# Altium PCB PCB1.PcbDoc
Units mil, origin at the board's own origin, x right, y up, seen from the top; angles counter-clockwise.
Board outline 3500 x 2050 mil, 2 copper layers (Top Layer, Bottom Layer), stack 61.756 mil thick; 51 components, 44 nets, 209 pads, 196 vias.
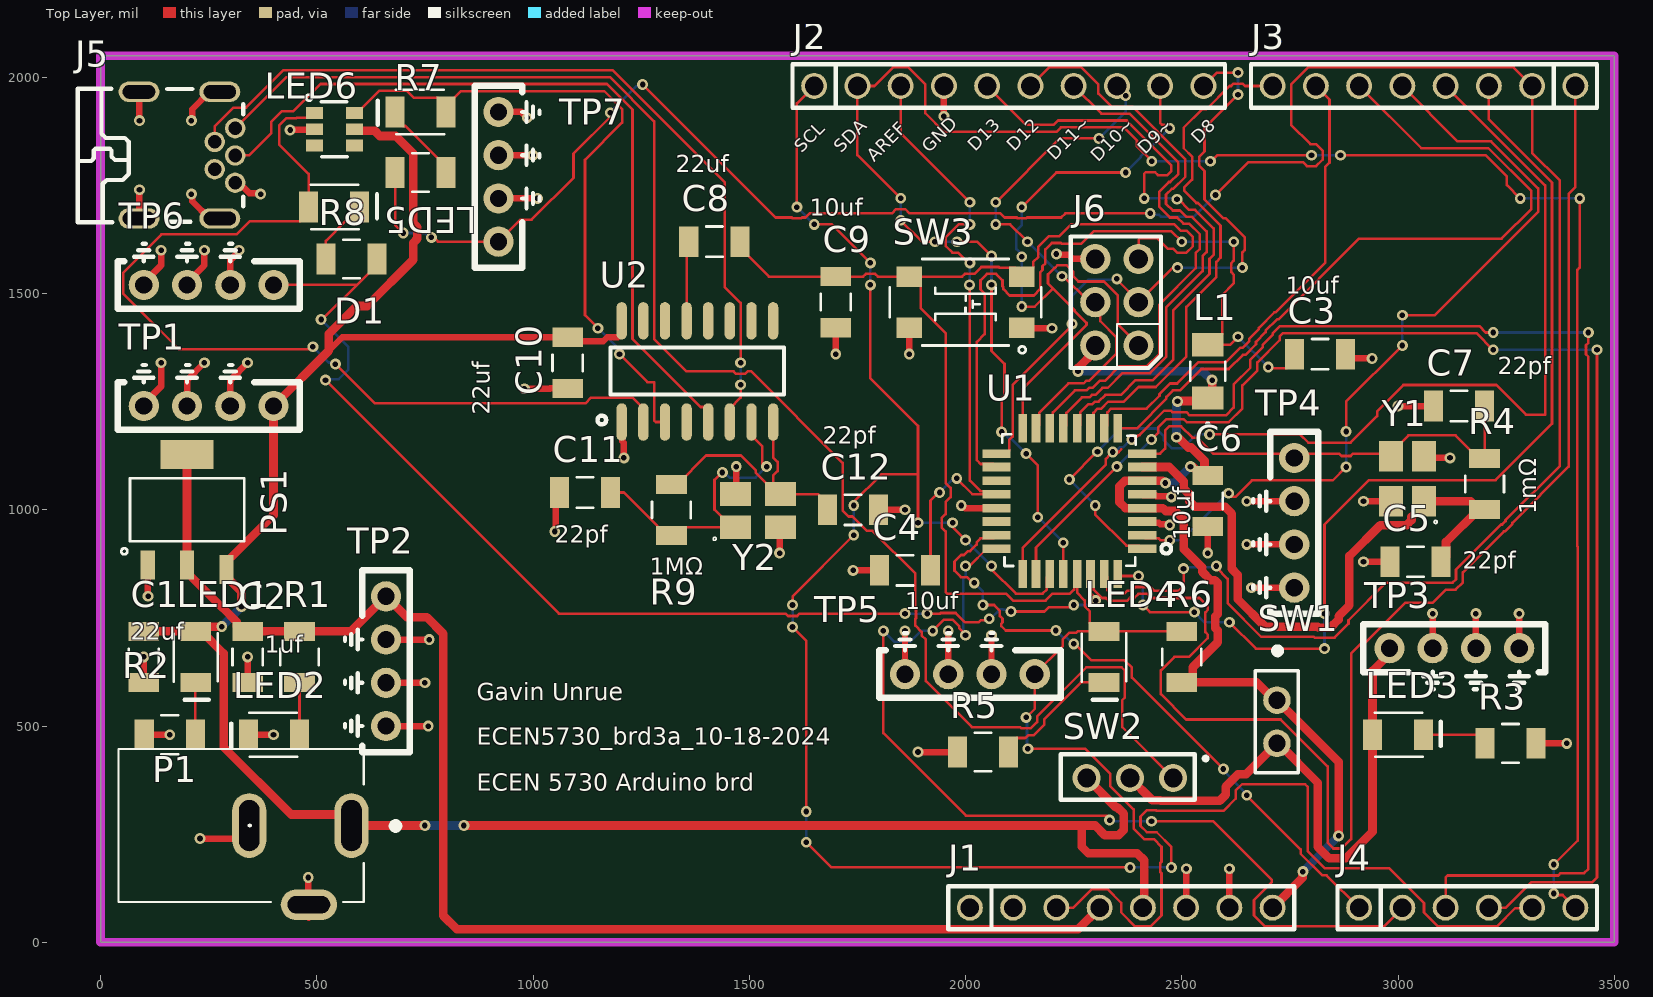
[diagram p0: Top Layer view]
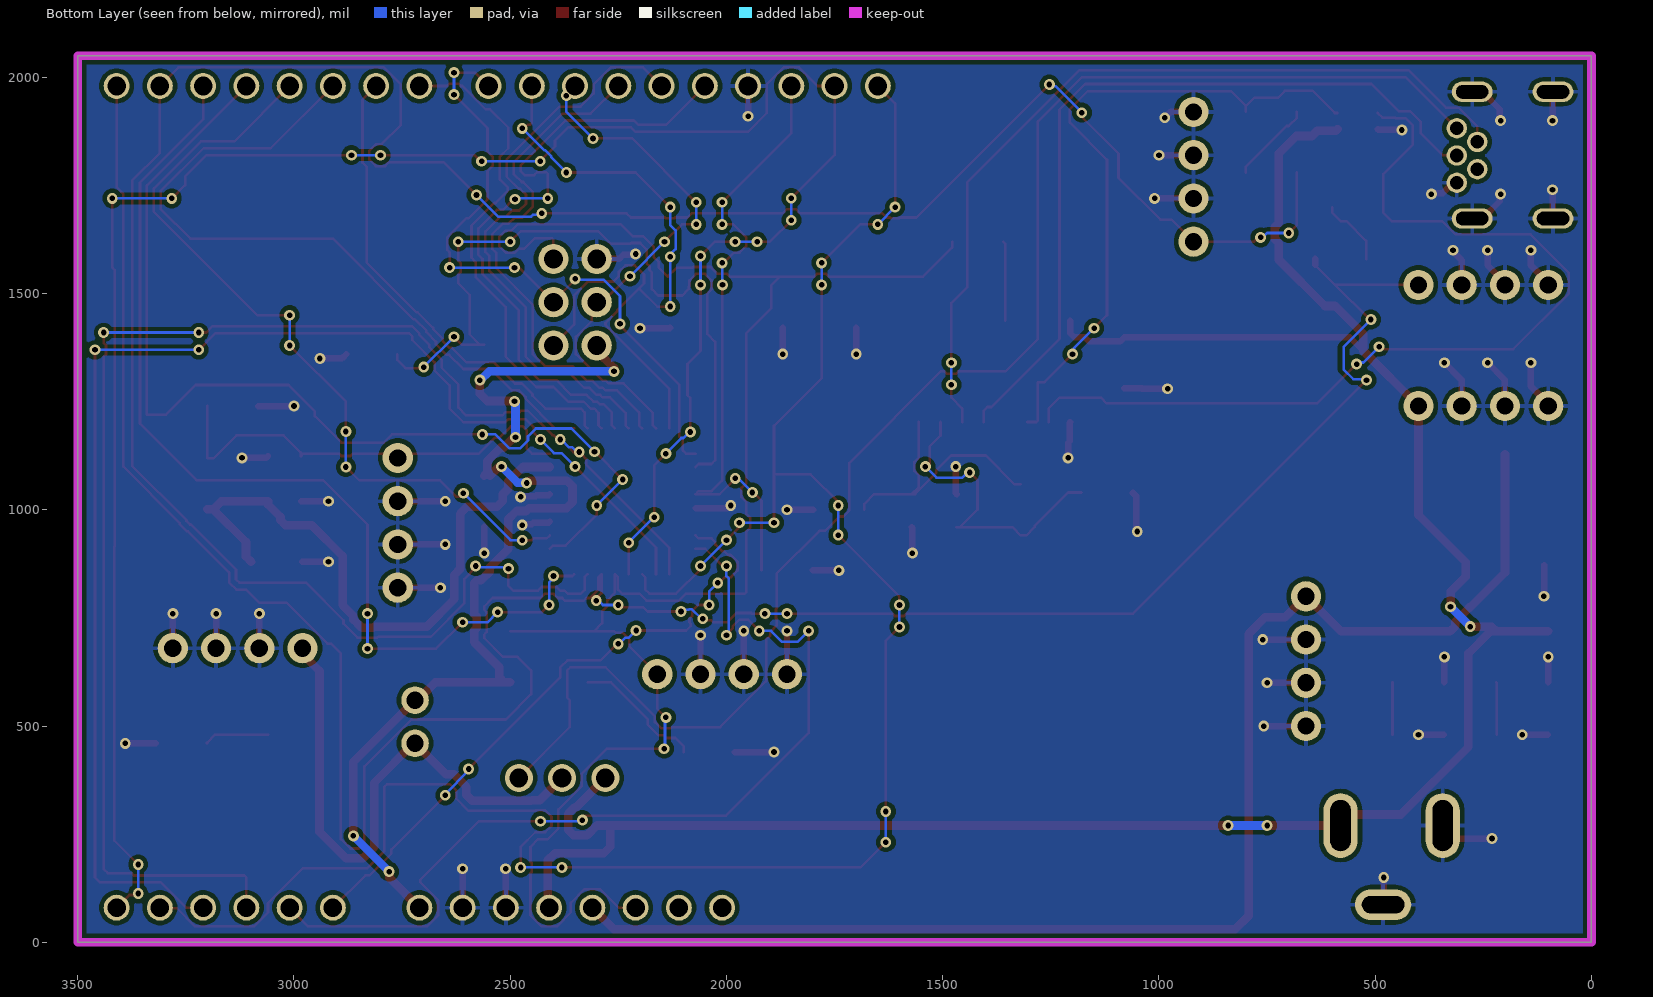
[diagram p1: Bottom Layer view, seen from below]
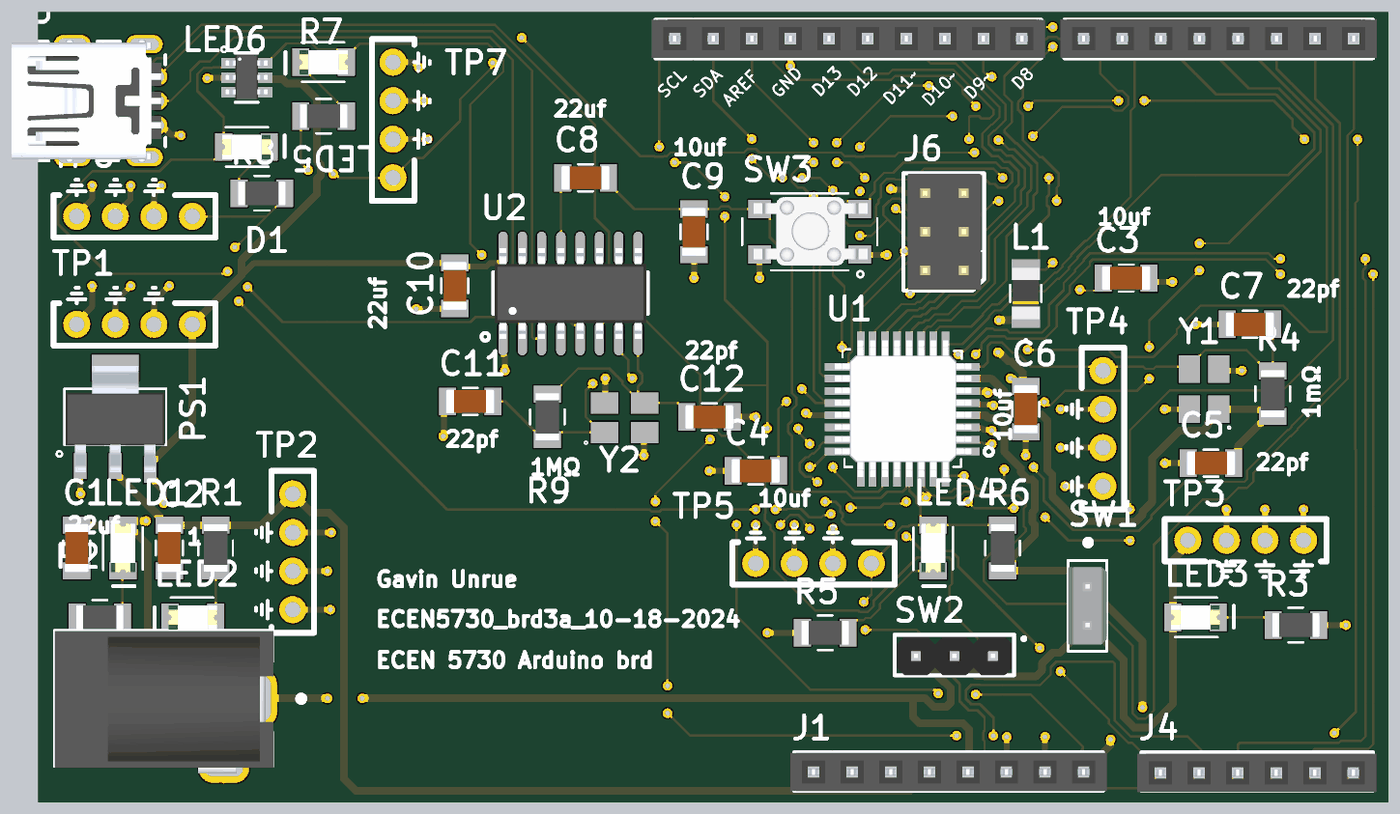
[diagram p2: 3D render of the assembled board from above, using the file's embedded part models]

## Layer stack, top to bottom
Top Solder: solder mask 1, SM-001, Dk 4
Top Layer: signal copper 1.378
Dielectric 1: core 59, Core-043, Dk 4.3
Bottom Layer: signal copper 1.378
Bottom Solder: solder mask 1, SM-001, Dk 4

## Board outline
0,0 3500,0 3500,2050 0,2050 0,1250

## Design rules (kind name [scope] priority, off if disabled: settings)
BoardOutlineClearance [All] p1: gap=10 ignorepadtopadclearanceinfootprint=FALSE except(0: Arc-SplitContinuation Track-SplitContinuation SMDPad-SplitContinuation THPad-SplitContinuation Via-SplitContinuation Fill-SplitContinuation Poly-SplitContinuation Region-SplitContinuation Text-SplitContinuation)
Clearance [All] p1: gap=10 ignorepadtopadclearanceinfootprint=FALSE
PlaneClearance [All] p1: clearance=10
PlaneConnect [All] p1: planeconnectstyle=Direct reliefexpansion=20 reliefentries=4 reliefconductorwidth=10 reliefairgap=10
PolygonConnect [All] p1: thpad.connectstyle=Relief thpad.reliefconductorwidth=10 thpad.reliefentries=4 thpad.polygonreliefangle="90 Angle" thpad.airgapwidth=10 smdpad.connectstyle=Direct smdpad.reliefconductorwidth=10 smdpad.reliefentries=4 smdpad.polygonreliefangle="90 Angle" smdpad.airgapwidth=10 via.connectstyle=Direct via.reliefconductorwidth=10 via.reliefentries=4 via.polygonreliefangle="90 Angle" via.airgapwidth=10
RoutingVias [All] p1: holewidth=13 width=25 viastyle="Through Hole" minholewidth=13 minwidth=25 maxholewidth=60 maxwidth=80
SolderMaskExpansion [All] p1: expansion=4 istentingtop=FALSE
UnRoutedNet [All] p1: checkbadconnections=TRUE
Width "Schematic Width Constraint" [InNet('+5')] p1: maxlimit=100 minlimit=10 preferedwidth=20 minimp=50.000000 maximp=50.000000 favimp=50.000000
Width [All] p2: maxlimit=100 minlimit=6 preferedwidth=6 minimp=50.000000 maximp=50.000000 favimp=50.000000
27 further rules are at their usual default settings.

## Components (designator, comment, footprint, x,y, rotation, side; value= is the part's Value field where it differs from the comment)
C1 "22uF" 1206_Passive_Capacitor 100,660 r90 top
C2 "1uF" 1206_Passive_Capacitor 340,660 r90 top
C3 "10uF" 1206_Passive_Capacitor 2820,1360 r180 top
C4 "10uF" 1206_Passive_Capacitor 1860,860 r0 top
C5 "22pF" 1206_Passive_Capacitor 3040,880 r0 top
C6 "10uF" 1206_Passive_Capacitor 2560,1020 r90 top
C7 "22pF" 1206_Passive_Capacitor 3141,1240 r0 top
C8 "22uF" 1206_Passive_Capacitor 1419,1620 r0 top
C9 "10uF" 1206_Passive_Capacitor 1700,1480 r90 top
C10 "22uF" 1206_Passive_Capacitor 1080,1340 r270 top
C11 "22pF" 1206_Passive_Capacitor 1120,1040 r0 top
C12 "22pF" 1206_Passive_Capacitor 1740,1000 r180 top
D1 "SRV05-4-P-T7" TVS 540,1880 r0 top value="TVS DIODE 5.5V 6TSOP"
J1 "PPTC081LFBN-RC" "8_PIN_100MIL - Female" 2010,80 r0 top value=Female
J2 "PPTC101LFBN-RC" 10_PIN_ARDUINO_100MIL 1650,1980 r0 top value=Female
J3 "PPTC081LFBN-RC" "8_PIN_100MIL - Female" 3410,1980 r180 top value=Female
J4 "PPTC061LFBN-RC" "6_PIN_100MIL -Female" 2910,80 r0 top value=Female
J5 "USB Mini" USB_MINI_B 200,1820 r270 top value="USB mini B"
J6 "NRPN032PAEN-RC" ICSP 2400,1380 r180 top
L1 "FB_10uH_1206" AIML-1206_ABR-M 2560,1320 r90 top
LED1 "Red" LED_1206 220,660 r270 top
LED2 "Red" LED_1206 401,480 r180 top
LED3 "Red" LED_1206 3000,480 r0 top
LED4 "Red" LED_1206 2320,660 r270 top
LED5 "Red" LED_1206 740,1920 r180 top
LED6 "Red" LED_1206 540,1700 r0 top
P1 "Power Jack" Power_Jack 580,270 r180 top value="CONN PWR JACK 2X5.5MM SOLDER"
PS1 "AMS1117-3.3" LDO 200,1000 r0 top value="IC REG LINEAR 3.3V 800MA SOT223"
R1 "1k" 1206_Passive_Resitor 460,660 r90 top value="1K Ohm"
R2 "1k" 1206_Passive_Resitor 160,480 r0 top value="1K Ohm"
R3 "1k" 1206_Passive_Resitor 3260,460 r180 top value="1K Ohm"
R4 "1M" 1206_Passive_Resitor 3200,1060 r270 top value="1M Ohm"
R5 "1k" 1206_Passive_Resitor 2040,440 r0 top value="1K Ohm"
R6 "10k" 1206_Passive_Resitor 2500,660 r90 top value=10KOhm
R7 "1k" 1206_Passive_Resitor 740,1780 r0 top value="1K Ohm"
R8 "1k" 1206_Passive_Resitor 580,1580 r180 top value="1K Ohm"
R9 "1M" 1206_Passive_Resitor 1320,1000 r270 top value="1M Ohm"
SW1 "led_on_off_sw" 2Pin-Header-Conn 2720,560 r270 top
SW2 "PREC003SAAN-RC" 3_PIN_100mil 2480,380 r180 top value="CONN HEADER VERT 3POS 2.54MM"
SW3 "TL3305AF160QG" Switch_JLC 2000,1480 r180 top
TP1 "5v TP" TP10x_Probe 250,1240 r180 top
TP2 "3.3v tp" TP10x_Probe 660,650 r270 top
TP3 "rg5vtp" TP10x_Probe 3130,680 r0 top
TP4 "atmegaXTALtp" TP10x_Probe 2760,970 r270 top
TP5 "resettp" TP10x_Probe 2010,620 r180 top
TP6 "rxtp" TP10x_Probe 250,1520 r180 top
TP7 "txtp" TP10x_Probe 920,1770 r90 top
U1 "ATMEGA328P-ANR" ATMega328P 2240,1020 r0 top value="IC MCU 8BIT 32KB FLASH 32TQFP"
U2 "CH340G" "USB to serial" 1380,1320 r0 top value="USB to Serial"
Y1 "X322516MLB4SI" "Crystal resonator" 3019.84,1071.97 r90 top value=16MHz
Y2 "X322512MSB4SI" "Crystal resonator" 1520,1000 r0 top value=12MHz

## Footprints (in the part's own frame and the unit in brackets; to place one, negate y for a bottom-side part, rotate by r counter-clockwise, add the part's x,y. Pads: shape width x height; smd on the part's side, far side on the other; paste and mask are expansions set on the pad)
2Pin-Header-Conn [mm]
  round 1.62 hole 1.02: 1(0,0) 2(2.54,0)
  silkscreen extent -3.03,-1.27 4.26,1.26, body extent -1.27,-1.27 3.81,1.27, height 8.13
3_PIN_100mil [mm]
  round 1.65 hole 1.1: 1(0,0) 2(2.54,0) 3(5.08,0)
  silkscreen extent -2,-1.4 6.6,1.27, body extent -1.14,-1.27 6.48,1.27, height 8.38
"6_PIN_100MIL -Female" [mil]
  round 60 hole 43.31: 1(0,0) 2(100,0) 3(200,0) 4(300,0) 5(400,0) 6(500,0)
  silkscreen extent -50,-50 550,50, body extent -61,-53 559,47, height 335
"8_PIN_100MIL - Female" [mil]
  round 60 hole 43.31: 1(0,0) 2(100,0) 3(200,0) 4(300,0) 5(400,0) 6(500,0) 7(600,0) 8(700,0)
  silkscreen extent -50,-50 750,50, body extent -60,-51 760,49, height 335
10_PIN_ARDUINO_100MIL [mil]
  round 60 hole 43.31: 1(0,0) 2(100,0) 3(200,0) 4(300,0) 5(400,0) 6(500,0) 7(600,0) 8(700,0) 9(800,0) 10(900,0)
  silkscreen extent -50,-50 950,50, body extent -60,-49 960,51, height 335
1206_Passive_Capacitor [mil]
  rect 44x71 smd: 1(-59,0) 2(59,0)
  silkscreen extent -19,-35 19,35, body extent -63,-31 63,32, height 50
1206_Passive_Resitor [mil]
  rect 44x71 smd: 1(-59,0) 2(59,0)
  silkscreen extent -19,-45 19,45, body extent -61,-31 61,31, height 26
AIML-1206_ABR-M [mil]
  rect 54x73 smd paste+0 mask+0: 1(-61.5,0) 2(61.5,0)
  silkscreen extent -124,-40 22,40, body extent -66,-36 66,36, height 55
ATMega328P [mm]
  rect 1.65x0.508 smd mask+0.025: 1(4.28,-2.794) 2(4.28,-2.007) 3(4.28,-1.194) 4(4.28,-0.406) 5(4.28,0.406) 6(4.28,1.194) 7(4.28,2.007) 8(4.28,2.794) 17(-4.28,2.794) 18(-4.28,2.007) 19(-4.28,1.194) 20(-4.28,0.406) 21(-4.28,-0.406) 22(-4.28,-1.194) 23(-4.28,-2.007) 24(-4.28,-2.794)
  rect 0.508x1.65 smd mask+0.025: 9(2.843,4.28) 10(2.056,4.28) 11(1.243,4.28) 12(0.455,4.28) 13(-0.357,4.28) 14(-1.145,4.28) 15(-1.958,4.28) 16(-2.745,4.28) 25(-2.745,-4.28) 26(-1.958,-4.28) 27(-1.145,-4.28) 28(-0.357,-4.28) 29(0.455,-4.28) 30(1.243,-4.28) 31(2.056,-4.28) 32(2.843,-4.28)
  silkscreen extent -3.94,-3.81 5.97,3.94, body extent -4.45,-4.47 4.55,4.53, height 1.16
"Crystal resonator" [mm]
  rect 1.8x1.4 smd: 1(-1.32,-1.02) 2(1.32,-1.02) 3(1.32,0.92) 4(-1.32,0.92)
  silkscreen extent -2.63,-1.79 -2.45,-1.61, body extent -1.65,-1.2 1.65,1.2, height 0.8
ICSP [mil]
  round 70 hole 43.31: 1(0,0) 2(0,-100) 3(0,-200) 4(100,0) 5(100,-100) 6(100,-200)
  silkscreen extent -52,-252 157,52, body extent -44,-250 146,50, height 330
LDO [mm]
  rect 0.838x1.7 smd: 1(-2.311,-3.25) 2(0,-3.25) 3(2.311,-3.5)
  rect 3.099x1.7 smd: 4(0,3.25)
  silkscreen extent -3.86,-2.62 3.35,1.85, body extent -3.25,-3.65 3.25,3.35, height 1.85
LED_1206 [mil]
  rect 44x71 smd: 1(-59,0) 2(59,0)
  silkscreen extent -54,-51 99,51, body extent -63,-31 63,31, height 28
Power_Jack [mm]
  oval 2x3.8 hole 1.2 slot 3 at 90 deg: 1(0,0) 2(6,0)
  oval 3.3x1.8 hole 1 slot 2.5 at 0 deg: 3(2.5,4.65)
  silkscreen extent -2.79,-4.5 13.68,4.5, body extent -0.76,-4.45 13.64,4.95, height 11.49
Switch_JLC [mm]
  rect 1.5x1.2 smd: 1(-3.3,1.5) 2(3.3,1.5) 3(-3.3,-1.5) 4(3.3,-1.5)
  silkscreen extent -4.44,-2.54 4.45,3, body extent -3.8,-2.29 3.7,2.21, height 3.7
TP10x_Probe [mil] "Small Probs footprint"
  round 70 hole 40: 1(-150,0) 2(-50,0) 2(50,0) 2(150,0)
  silkscreen extent -210,-95 210,55
TVS [mm]
  rect 1x0.7 smd mask+0.025: 1(-1.162,0.95) 2(-1.162,0) 3(-1.162,-0.95) 4(1.2,-0.95) 5(1.2,0) 6(1.2,0.95)
  silkscreen extent -1.65,-1.63 0.76,2.03, body extent -1.37,-1.44 1.38,1.46, height 1.1
"USB to serial" [mil]
  oval 24x86.61 smd: 1(-175,-117) 2(-125,-117) 3(-75,-117) 4(-25,-117) 5(25,-117) 6(75,-117) 7(125,-117) 8(175,-117) 9(175,117) 10(125,117) 11(75,117) 12(25,117) 13(-25,117) 14(-75,117) 15(-125,117) 16(-175,117)
  silkscreen extent -231,-122 201,56, body extent -197,-118 197,118, height 71
USB_MINI_B [mm]
  round 1.2 hole 0.8: 1(-1.58,2.826) 2(-0.78,1.622) 3(0.02,2.826) 4(0.82,1.622) 5(1.62,2.826)
  oval 1.2x2.4 hole 0.8 slot 1.9 at 90 deg: 6(-3.72,1.924) 7(3.72,1.924) 8(-3.72,-2.826) 9(3.72,-2.826)
  silkscreen extent -3.89,-6.42 3.93,3.3, body extent -4.04,-6.83 4.06,3.02, height 3.98

## Part data
C1 C8 C10: library part C_22uF_1206, "22uF ±10% 25V X5R 1206 Multilayer Ceramic Capacitors MLCC - SMD/SMT RoHS", LCSC Part#=C12891, MFR Part #=CL31A226KAHNNNE, Datasheet=https://datasheet.lcsc.com/lcsc/1811031514_Samsung-Electro-Mechanics-CL31A226KAHNNNE_C12891.pdf, Type=basic
C2: library part C_1uF_1206, "MULTILAYER CERAMIC CAPACITORS MLCC - SMD/SMT 1UF 50V 1206 ROHS", LCSC Part#=C1848, MFR Part #=CL31B105KBHNNNE, Digikey Link=https://www.digikey.com/product-detail/en/C1206C105M4RACTU/399-8150-1-ND/3471873/?itemSeq=304982366, Type=Basic
C3 C4 C6 C9: library part C_10uF_1206, "10uF ±10% 50V X5R 1206 Multilayer Ceramic Capacitors MLCC - SMD/SMT RoHS", LCSC Part#=C13585, MFR Part #=CL31A106KBHNNNE, Datasheet=https://datasheet.lcsc.com/lcsc/1810221112_Samsung-Electro-Mechanics-CL31A106KBHNNNE_C13585.pdf, Type=Basic
C5 C7 C11 C12: library part C_22pF_1206, "22pF ±5% 1kV C0G 1206 Multilayer Ceramic Capacitors MLCC - SMD/SMT RoHS", LCSC Part#=C107174, MFR Part #=CC1206JKNPOCBN220, Datasheet=https://datasheet.lcsc.com/lcsc/1810241219_YAGEO-CC1206JKNPOCBN220_C107174.pdf, Type=Extended
D1: library part D_TVS_Diode, "TVS SOT-23-6 ROHS", LCSC Part#=C85364, Datasheet=https://datasheet.lcsc.com/szlcsc/ProTek-Devices-SRV05-4-P-T7_C85364.pdf, MFR Part #=SRV05-4-P-T7, Type=Basic
J1 J3: library part JF_8_PIN_FEMALE, "8 Position Header Connector 0.100\" (2.54mm) Through Hole Tin", LCSC Part#=C27438, Digikey Link=https://www.digikey.com/product-detail/en/PPTC081LFBN-RC/S7006-ND/810147/?itemSeq=304982354, MFR Part #=PPTC081LFBN-RC, Type=Extended
J2: library part JF_10_PIN_FEMA_ARDUINO, "10 Position Header Connector 0.100\" (2.54mm) Through Hole Tin", LCSC Part#=C225507, Digikey Link=https://www.digikey.com/product-detail/en/PPTC101LFBN-RC/S7008-ND/810149/?itemSeq=304982352, MFR Part #=PPTC101LFBN-RC, Type=Extended
J4: library part JF_6_PIN_FEMALE, "6 Position Header Connector 0.100\" (2.54mm) Through Hole Tin", LCSC Part#=C40877, Digikey Link=https://www.digikey.com/product-detail/en/PPTC061LFBN-RC/S7004-ND/810145/?itemSeq=304982353, MFR Part #=PPTC061LFBN-RC, Type=Extended
J5: library part J_USB_B_Mini, "Through Hole USB Connectors RoHS", LCSC Part#=C46398, MFR Part #=920-462A2021D10102, Datasheet=https://datasheet.lcsc.com/szlcsc/2103081233_Jing-Extension-of-the-Electronic-Co-920-462A2021D10102_C46398.pdf, Type=Extended
J6: library part J_ICSP, "Connector Header Through Hole 6 position 0.079\" (2.00mm)", LCSC Part#=C124384, Digikey Link=https://www.digikey.com/product-detail/en/NRPN032PAEN-RC/S5801-03-ND/804955/?itemSeq=304982355, MFR Part #=NRPN032PAEN-RC, Type=Extended
L1: "25mA 10uH ±10% 800mΩ 1206  Inductors (SMD) ROHS", LCSC Part#=C1051, MFR Part #=CMI321609X100KT, Mfr_Name="FH (Guangdong Fenghua Advanced Tech)", Datasheet=https://datasheet.lcsc.com/lcsc/1810311314_FH--Guangdong-Fenghua-Advanced-Tech-CMI321609X100KT_C1051.pdf, Type=Basic
LED1 LED2 LED3 LED4 LED5 LED6: library part LED_RED_1206, "Red 621~631nm 1206 Light Emitting Diodes (LED) RoHS", LCSC Part#=C93133, MFR Part #=15-21/R6C-FQ1R1B/2T, Datasheet=https://datasheet.lcsc.com/szlcsc/1811151241_Everlight-Elec-15-21-R6C-FQ1R1B-2T_C93133.pdf, Type=Extended
P1: library part "P_Power Jack", "Power Barrel Connector Jack 2.10mm ID (0.083\"), 5.50mm OD (0.217\") Through Hole, Right Angle", LCSC Part#=C136744, MFR Part #=PJ-102A, Digikey Link=https://www.digikey.com/product-detail/en/PJ-102A/CP-102A-ND/275425/?itemSeq=304982367, Type=Extended
PS1: library part PS_AMS_LDO_3v3, "LOW DROPOUT REGULATORS(LDO) POSITIVE FIXED 1.3V @ 800MA 15V 3.3V 1A SOT-223 ROHS", LCSC Part#=C6186, MFR Part #=AMS1117-3.3, Type=Basic
R1 R2 R3 R5 R7 R8: library part R_1K_1206, "CHIP RESISTOR - SURFACE MOUNT 1KOHMS ±1% 1/4W 1206 ROHS", LCSC Part#=C4410, MFR Part #=RNCP1206FTD1K00CT, Digikey Link=https://www.digikey.com/product-detail/en/RNCP1206FTD1K00/RNCP1206FTD1K00CT-ND/2240675/?itemSeq=304982373, Type=Basic
R4 R9: library part R_1M_1206, "CHIP RESISTOR - SURFACE MOUNT 1MOHMS ±1% 1/4W 1206 ROHS", LCSC Part#=C17927, MFR Part #=RMCF1206JT1M00, Digikey Link=https://www.digikey.com/product-detail/en/RMCF1206JT1M00/RMCF1206JT1M00CT-ND/1942830/?itemSeq=304982358, Type=Basic
R6: library part R_10KOhm_1206, "10 kOhms ±5% 0.25W, 1/4W Chip Resistor 1206 (3216 Metric) Automotive AEC-Q200 Thick Film", LCSC Part#=C17902, MFR Part #=RMCF1206FT10K0, Digikey Link=https://www.digikey.com/en/products/detail/stackpole-electronics-inc/RMCF1206FT10K0/1759669, Type=Basic
SW1: library part SW_2Pin_100mil_Switch, "2Pin Header", LCSC Part#=C124375, Type=Extended
SW2: library part SW_3Pin_100mil_Switch, "Connector Header Through Hole 3 position 0.100\" (2.54mm)", LCSC Part#=C49257, Digikey Link=https://www.digikey.com/product-detail/en/PREC003SAAN-RC/S1012EC-03-ND/2774851/?itemSeq=304982371, MFR Part #=PREC003SAAN-RC, Type=Extended
SW3: library part SW_Push_Button_JLC, "Tactile Switch SPST-NO Top Actuated Surface Mount", LCSC Part#=C2837550, MFR Part #=KH-4.5X4.5X4.3H-STM, Datasheet=https://datasheet.lcsc.com/lcsc/2106081532_Shenzhen-Kinghelm-Elec-KH-4.5X4.5X4.3H-STM_C2837550.pdf, Type=Extended
TP1 TP2 TP3 TP4 TP5 TP6 TP7: library part TP_10x_Probe, "Test Point 300 mil centers"
U1: library part U_ATMega328P, "AVR AVR® ATmega Microcontroller IC 8-Bit 20MHz 32KB (16K x 16) FLASH 32-TQFP (7x7)", LCSC Part#=C14877, MFR Part #=ATMEGA328P-AU, Digikey Link=https://www.digikey.com/product-detail/en/ATMEGA328P-ANR/ATMEGA328P-ANRCT-ND/2774230/?itemSeq=304982365, Type=Basic
U2: library part U_USBtoSerial, "Transceiver USB 2.0 2Mbps SOP-16_150mil USB ICs RoHS", LCSC Part#=C14267, Datasheet=https://datasheet.lcsc.com/lcsc/2008191806_WCH-Jiangsu-Qin-Heng-CH340G_C14267.pdf, MFR Part #=CH340G, Type=Basic
Y1: library part X_16Mhz_Res, "±10ppm 16000000Hz -40℃~85℃ 贴片无源晶振 60Ω 9pF SMD3225-4P Crystals ROHS", LCSC Part#=C13738, MFR Part #=X322516MLB4SI, Type=Basic
Y2: library part X_12MHz_Res, "SMD Crystal Resonators 12MHz ±10ppm SMD-3225_4P RoHS", LCSC Part#=C9002, Datasheet=https://datasheet.lcsc.com/szlcsc/Yangxing-Tech-X322512MSB4SI_C9002.pdf, MFR Part #=X322512MSB4SI, Type=Basic

## Via types
v1: diameter 25, hole 13, Top Layer to Bottom Layer, 196 vias

## Nets (pads, with @x,y where several pads share a name; then routed paths per layer and width w, separated by ;. In a path a pad name is that pad's centre, name@x,y a point inside that pad or via, vN(x,y) a via of type N, cw(c..) or ccw(c..) an arc to the next point about the centre after c; other vN are vias at no path point)
3v: C2.2 J1.4 PS1.2 PS1.4 R1.2 TP2.1 | length 3200.4
  Top Layer w20: PS1.4 PS1.2 200,855.08 281.01,774.08 281.89,774.08 314.5,741.46 314.5,731 326.5,719 R1.2 579,719 TP2.1 708.05,751.95 754.01,751.95 792.5,713.46 792.5,61.72 824.22,30 2260,30 J1.4
+5: C1.2 C10.1 D1.5 J1.5 LED1.1 P1.1 PS1.3 SW2.3 TP1.1 U2.16 | length 5349.4
  Top Layer w15: 527.59,1367.59 559,1399 C10.1 1089,1390 1162.43,1390 1171.43,1399 1195.87,1399 1205,1408.13 U2.16
  Top Layer w20: C1.2 LED1.1 ; v1(280,730) 231,730 LED1.1 ; v1(325.96,775.96) 325.01,776.92 325.01,811.23 291,845.24 PS1.3 291,879.17 400,988.17 TP1.1 527.59,1367.59 527.59,1406.48 592.46,1471.35 616.13,1471.35 723,1578.22 723,1617.04 732.5,1626.54 732.5,1653.46 723,1662.96 723,1823.78 682.28,1864.5 645.55,1864.5 633.67,1876.38 590.87,1876.38 D1.5 ; v1(750,270) P1.1 554.57,295.43 440.78,295.43 284.5,451.72 284.5,668 233.5,719 LED1.1 ; v1(840,270) 2268.28,270 ; SW2.3 2347.5,312.5 2350.65,312.5 2365.5,297.65 2365.5,259.54 2353.46,247.5 2322.12,247.5 2299.62,270 2268.28,270 ; J1.5 2413,83 2413,189.53 2396.91,205.62 2284.38,205.62 2268.28,221.72 2268.28,270
  Bottom Layer w20: v1(280,730) v1(325.96,775.96) ; v1(750,270) v1(840,270)
dtr: C8.1 U2.13 | length 185.1
  Top Layer w6: U2.13 1355,1615 C8.1
GND: C1.1 C2.1 C3.1 C4.1 C5.1 C6.1 C7.1 C9.1 C10.2 C11.1 C12.1 D1.2 J1.6 J1.7 J2.4 J5.5 J5.6 J5.7 J5.8 J5.9 J6.6 LED2.2 P1.2 P1.3 PS1.1 R2.1 R3.1 R5.1 SW3.1 SW3.2 TP1.2 TP2.2 TP3.2 TP4.2 TP5.2 TP6.2 TP7.2 U1.3 U1.5 U1.21 U2.1 Y1.2 Y1.4 Y2.2 Y2.4 | length 4831.7
  Top Layer w15: J5.9 90,1674.8 v1(90,1740) ; J5.8 90,1965.2 v1(90,1900) ; C1.1 v1(100,660) ; TP1.2@100,1240 100,1245.14 140,1285.14 v1(140,1340) ; TP6.2@100,1520 100,1525.14 139.86,1565 139.86,1599.86 v1(140,1600) ; R2.1 v1(160,480) ; PS1.1 109.5,871.55 109.5,800.5 v1(110,800) ; TP1.2@200,1240 200.21,1240.21 200.21,1300.21 v1(240,1340) ; TP6.2@200,1520 200,1525.14 239.86,1565 239.86,1599.86 v1(240,1600) ; v1(210,1730) 211.91,1728.09 211.91,1713.76 252.13,1673.55 J5.7 ; v1(210,1900) 211.91,1901.91 211.91,1926.24 252.13,1966.45 J5.6 ; v1(230,240) P1.2@343.78,240 ; TP1.2@300,1240 300.21,1240.21 300.21,1300.21 v1(340,1340) ; TP6.2@300,1520 300.21,1520.21 300.21,1577.5 320,1597.29 v1(320,1600) ; J5.5 319.98,1756.22 344.29,1731.91 368.09,1731.91 v1(370,1730) ; C2.1 v1(340,660) ; LED2.2 v1(400,480) ; v1(438.22,1878.22) 439.11,1879.11 493.34,1879.11 D1.2 ; v1(480,150) 480,58.5 P1.3@481.57,56.93 ; TP2.2@660,500 v1(757.5,500) ; TP2.2@660,600 v1(750,600) ; TP2.2@660,700 v1(760,700) ; TP7.2@920,1720 v1(1010,1720) ; TP7.2@920,1820 v1(1000,1820) ; TP7.2@920,1920 973.21,1920 v1(986.62,1906.62) ; v1(980,1280) 1039,1280 1040,1281 C10.2 ; v1(1050,950) 1051.91,951.91 1051.91,1030.91 C11.1 ; U2.1 1206.72,1201.28 1206.72,1158.28 1210,1155 v1(1210,1120) ; Y2.4 1470,1038.19 v1(1470,1100) ; v1(1570,900) 1570,957.87 Y2.2 ; v1(1700,1360) C9.1 ; v1(1740,860) C4.1 ; C12.1 v1(1860,1000) ; TP5.2@1860,620 v1(1860,720) ; v1(1870,1360) 1870,1420.87 SW3.2 ; v1(1890,440) R5.1 ; v1(1950,1910) J2.4 ; TP5.2@1960,620 v1(1960,720) ; v1(1990,1010) 1992.71,1010 1998.71,1004 U1.21 ; TP5.2@2060,620 v1(2060,710) ; SW3.1 2130.87,1420 v1(2200,1420) ; v1(2210,1591.5) 2211.91,1589.59 2238.56,1589.59 2248.14,1580 J6.6 ; U1.3 2411,970.5 2444.5,970.5 2445,970 2446.73,970 2450.11,966.63 2470.09,966.63 v1(2472,964.71) ; U1.5 2411,1033.5 2439.72,1033.5 2441.38,1031.84 2474.08,1031.84 v1(2476,1029.93) ; J1.6 2510.34,80.34 2510.34,169.6 v1(2510.67,169.94) ; v1(2560,900) C6.1 ; J1.7 v1(2610,170) ; v1(2650,920) TP4.2@2760,920 ; v1(2650,1020) TP4.2@2760,1020 ; v1(2661.5,820) TP4.2@2760,820 ; C3.1 2889,1350 v1(2940,1350) ; v1(2920,880) C5.1 ; v1(2920,1020) Y1.4 ; v1(3000,1240) C7.1 ; Y1.2 3063.94,1120 v1(3120,1120) ; TP3.2@3080,680 v1(3080,760) ; TP3.2@3180,680 v1(3180,760) ; TP3.2@3280,680 v1(3280,760) ; R3.1 v1(3390,460)
NetC3_2: C3.2 L1.2 U1.18 | length 1735
  Top Layer w6: U1.18 2064.5,1106 2034.63,1106 2026.02,1114.62 2026.02,1388.57 2044,1406.56 2044,1499.94 2034.5,1509.44 2034.5,1530.56 2049.44,1545.5 2070.56,1545.5 2085.5,1530.56 2085.5,1517.13 2087.39,1515.23 2087.39,1510.05 2101.94,1495.5 2157.9,1495.5 2172.45,1510.05 2172.45,1548.9 2178,1554.45 2178,1563.25 2184.5,1569.75 2184.5,1602.06 2199.44,1617 2220.56,1617 2222.06,1615.5 2267.62,1615.5 2296.1,1643.98 2476.02,1643.98 v1(2500,1620) ; L1.2 L1.2@2569.5,1381.5 ; v1(2620,1620) 2620,1576.06 2614.5,1570.56 2614.5,1549.44 2620,1543.94 2620,1523.43 2593.5,1496.93 2593.5,1405.5 L1.2@2569.5,1381.5 ; v1(2630,1400) 2611.49,1381.5 L1.2@2569.5,1381.5 ; v1@2710.13,1327.5 2742,1327.5 2761,1346.5 C3.2
  Bottom Layer w6: v1(2500,1620) v1(2620,1620) ; v1(2630,1400) v1(2700,1330)
NetC4_2: C4.2 J2.3 U1.20 | length 1475.4
  Top Layer w6: J2.3 1850,1871 v1(2010,1711) ; C4.2 1919,1021 1938,1040 v1(1940,1040) ; v1(1979.5,1072.62) 2016.12,1036 U1.20 2064.5,1043 2034.63,1043 2010,1067.63 2010,1519 v1(2009,1520) ; v1(2010,1571) 2006.37,1571 1982.87,1594.5 1969.44,1594.5 1954.5,1609.44 1954.5,1630.56 1983.94,1660 v1(2010,1660)
  Bottom Layer w6: v1(1940,1040) 1968.99,1068.99 1975.86,1068.99 v1(1979.5,1072.62) ; v1(2009,1520) 2009.5,1520.5 2009.5,1570.5 v1(2010,1571) ; v1(2010,1660) v1(2010,1711)
NetC5_2: C5.2 R4.2 U1.7 Y1.1 | length 1438.7
  Top Layer w20: U1.7 2470.98,1099 2504.5,1065.48 2504.5,1048.72 2517,1036.22 2517,1020.47 2530.47,1007 2599.78,1007 2615.5,991.28 2615.5,863.59 2629,850.09 2629,793.68 2693.17,729.51 2814.53,729.51 2816.54,727.5 2843.46,727.5 2862.5,746.54 2862.5,754.22 2887.5,779.22 2887.5,893.46 2958.61,964.57 3019.47,964.57 3031.18,976.28 3031.18,983.31 3060,1012.13 Y1.1 3167.5,1020 R4.2@3186.5,1001 ; C5.2 3111,892 3111,925.5 R4.2@3186.5,1001 ; R4.2 R4.2@3186.5,1001
NetC7_2: C7.2 R4.1 TP4.1 U1.8 Y1.3 | length 1043.6
  Top Layer w6: U1.8 2449.98,1130 2461.42,1141.43 2461.42,1183.94 2470.62,1193.15 2498.21,1193.15 2524.42,1166.94 2535.59,1166.94 2572.53,1130 2760,1130 2863.94,1130 2869.44,1124.5 2890.56,1124.5 2896.06,1130 2977.56,1130 Y1.3 2983.62,1131.81 3024.18,1172.37 3133.13,1172.37 3186.5,1119 R4.1 C7.2
NetC11_2: C11.2 R9.2 U2.7 Y2.1 | length 729.7
  Top Layer w6: C11.2 1210,1040 1287.5,962.5 1287.5,960 1306.5,941 R9.2 1338.84,959.84 Y2.1@1460.16,959.84 ; v1(1437.8,1086.28) 1436.71,1086.28 1419.6,1069.16 1419.6,1000.4 Y2.1@1460.16,959.84 ; Y2.1 Y2.1@1460.16,959.84 ; U2.7 1505,1171.69 1530,1146.69 1530,1103.51 1536.49,1103.51 v1(1540,1100)
  Bottom Layer w6: v1(1437.8,1086.28) 1442.94,1086.28 1454.72,1074.5 1514.5,1074.5 v1(1540,1100)
NetC12_2: C12.2 R9.1 U2.8 Y2.3 | length 634.3
  Top Layer w6: R9.1 1333.5,1059 1400,1125.5 1480.56,1125.5 1514.5,1091.56 1514.5,1085.82 1564.09,1036.22 Y2.3 ; U2.8 1555,1121.06 1565.5,1110.56 1565.5,1089.44 1555,1078.94 1555,1053.19 Y2.3 ; C12.2 1681,1013.5 1658.28,1036.22 Y2.3
NetD1_1: D1.1 LED6.1 U2.2 | length 2219.7
  Top Layer w6: v1(491.04,1377) 491.04,1374.78 487.53,1371.26 180.85,1371.26 52,1500.12 52,1548.06 140.86,1636.92 314.55,1636.92 345.12,1667.5 462,1667.5 481,1686.5 LED6.1 481,1776.5 412.72,1844.78 412.72,1888.78 429.44,1905.5 452.85,1905.5 454.13,1906.78 483.61,1906.78 D1.1 ; v1(542.98,1337.02) 634,1246 1120.88,1246 1134.19,1259.31 1230,1259.31 1255,1234.31 U2.2
  Bottom Layer w6: v1(491.04,1377) 527.39,1340.65 539.35,1340.65 v1(542.98,1337.02)
NetD1_6: D1.6 LED5.1 U2.3 | length 1556.5
  Top Layer w6: D1.6 593.15,1917.4 644.25,1968.5 708.81,1968.5 724.81,1952.5 780,1952.5 LED5.1@799,1933.5 ; LED5.1 LED5.1@799,1933.5 ; v1(1150,1420) 1120,1450 1120,1809.3 1206,1895.3 1206,1926.63 1164.63,1968 833.5,1968 LED5.1@799,1933.5 ; v1(1200,1360) 1264.66,1295.34 1280,1295.34 1280,1207 1284,1203 U2.3
  Bottom Layer w6: v1(1150,1420) 1196.36,1373.64 1196.36,1363.64 v1(1200,1360)
NetJ2_1: J2.1 J4.5 U1.27 | length 4850.5
  Top Layer w6: v1(1600,729) 1631.48,697.52 v1(1631.48,302.5) ; v1(1600,780) 1600,800 v1(1741.5,941.5) ; v1(1610,1700) 1610,1940 J2.1 ; v1(1631.48,231.48) 1689.84,173.12 v1(2380.5,173.12) ; v1(1650.02,1659.98) 1691.02,1659.98 v1(1780,1571) ; v1(1741.5,1010) 1740,1011.5 1740,1016.88 1805.16,1082.05 1890,1082.05 ; v1(1780,1520) 1780,1304.1 1890,1194.1 1890,1082.05 ; v1(1890,970) 1890,1082.05 ; v1(1970,970) 1970,960 v1(2000,930) ; v1(2060,870) 2060,862.56 2116.54,806.02 2178.31,806.02 2187.93,815.63 2187.93,844.5 U1.27 ; v1(2475.82,173.12) 2475.82,220.75 2442.07,254.5 2419.44,254.5 2404.5,269.44 2404.5,290.56 2419.44,305.5 2440.56,305.5 2441.54,304.52 2597.05,304.52 2624.5,331.97 2624.5,350.56 2639.44,365.5 2785.31,365.5 2791,359.81 2791,211.42 2831.42,171 2979.81,171 3060,90.81 3060,69.19 3092.19,37 3228.82,37 3271,79.18 3309.18,79.18 J4.5
  Bottom Layer w6: v1(1600,729) v1(1600,780) ; v1(1610,1700) v1(1650.02,1659.98) ; v1(1631.48,231.48) v1(1631.48,302.5) ; v1(1741.5,941.5) v1(1741.5,1010) ; v1(1780,1520) v1(1780,1571) ; v1(1890,970) v1(1970,970) ; v1(2000,930) v1(2060,870) ; v1(2380.5,173.12) v1(2475.82,173.12)
NetJ2_2: J2.2 J4.6 U1.28 | length 5000.3
  Top Layer w6: v1(1850,1669.5) 1899.5,1620 v1(1929,1620) ; v1(1850,1720.5) 1750,1820.5 J2.2 1789.19,1980 1832.19,2023 1867.81,2023 1907,1983.81 1907,1916.94 1949.94,1874 2210.39,1874 2220.58,1884.19 2365.81,1884.19 2396.36,1853.64 2396.36,1840.2 v1(2430.55,1806.01) ; v1(1980,1620) 2027,1620 v1(2060,1587) ; v1(2060,1520) 2060,1367.57 2090,1337.57 2090,1264.64 2083.43,1258.07 v1(2083.43,1180) ; v1(2140,1130) 2166.97,1103.03 v1(2166.97,983.03) ; U1.28 v1(2225.93,924.07) ; v1(2566.01,1806.01) 2568.45,1806.01 2582.44,1820 v1(2800,1820) ; v1(2867,1820) 2870,1823 2873,1820 3202.12,1820 3251.46,1770.65 3251.46,1751.04 v1(3282.5,1720) ; v1(3360,113) 3363.64,109.36 3380.64,109.36 J4.6 ; v1(3360,180) 3415.5,235.5 3415.5,914.45 3414.5,915.45 3414.5,1554.4 3420,1559.9 v1(3420,1720)
  Bottom Layer w6: v1(1850,1669.5) v1(1850,1720.5) ; v1(1929,1620) v1(1980,1620) ; v1(2060,1520) v1(2060,1587) ; v1(2083.43,1180) 2085.76,1180 2099.8,1165.96 2104.04,1165.96 v1(2140,1130) ; v1(2166.97,983.03) v1(2225.93,924.07) ; v1(2430.55,1806.01) v1(2566.01,1806.01) ; v1(2800,1820) v1(2867,1820) ; v1(3282.5,1720) v1(3420,1720) ; v1(3360,113) v1(3360,180)
NetJ2_5: J2.5 U1.12 | length 1488.5
  Top Layer w6: J2.5 2140,1890 2203.76,1890 2213.95,1900.19 2372.44,1900.19 2476,1796.63 2476,1783.37 2466.63,1774 2444.83,1774 2438.31,1780.51 2416.51,1780.51 2413,1777 v1(2413,1720) ; U1.12 2264.93,1195.5 2264.93,1225.37 2283.8,1244.24 2293.18,1244.24 2298.92,1249.98 2307.29,1249.98 2323.29,1265.98 2359.36,1265.98 2393.37,1300 2433.14,1300 2480,1346.86 2480,1461.31 2564,1545.31 2564,1580.06 2573.5,1589.56 2573.5,1650.44 2530.44,1693.5 2517.01,1693.5 2492.32,1718.19 v1(2489.01,1718.19)
  Bottom Layer w6: v1(2413,1720) 2487.21,1720 v1(2489.01,1718.19)
NetJ2_6: J2.6 U1.13 | length 1372.1
  Top Layer w6: J2.6 2193,2023 2267.81,2023 2307,1983.81 2307,1962.19 2337,1932.19 2385.7,1932.19 2508,1809.88 2508,1770.12 2479.88,1742 2476.76,1742 2463.51,1728.75 2463.51,1707.63 2479.16,1691.98 2495.9,1691.98 2510.38,1677.5 2523.82,1677.5 2557.5,1643.82 2557.5,1596.18 2548,1586.68 2548,1551.94 2464,1467.94 2464,1353.49 2426.51,1316 2362.8,1316 2328.78,1281.98 2316.66,1281.98 2300.66,1265.98 2292.29,1265.98 2286.55,1260.24 2268.8,1260.24 2232.93,1224.37 2232.93,1195.5 U1.13
NetJ2_7: J2.7 U1.14 | length 1215.6
  Top Layer w6: U1.14 2201.93,1195.5 2201.93,1225.37 2252.8,1276.24 2279.92,1276.24 2285.66,1281.98 2294.03,1281.98 2310.03,1297.98 2322.15,1297.98 2356.17,1332 2419.88,1332 2448,1360.12 2448,1474.57 2532,1558.57 2532,1593.31 2541.5,1602.81 2541.5,1637.19 2517.19,1661.5 2503.75,1661.5 2489.27,1675.98 2472.53,1675.98 2447.51,1701 2447.51,1735.38 2470.13,1758 2473.25,1758 2492,1776.75 2492,1803.25 2379.07,1916.19 2313.81,1916.19 J2.7
NetJ2_8: J2.8 J6.5 U1.15 | length 1231.7
  Top Layer w6: v1(2070.02,1659.98) 2103.11,1659.98 v1(2143.09,1620) ; v1(2070.02,1711) 2217.7,1858.69 v1(2308.69,1858.69) ; U1.15 2169.93,1195.5 2169.93,1224.37 2237.8,1292.24 2273.29,1292.24 2279.03,1297.98 2285.87,1297.98 2348,1360.12 2348,1399.88 2311.88,1436 2311.88,1468.12 J6.5 2286.12,1480 2224.6,1541.51 v1(2223.09,1540) ; J2.8 2350,1965.39 2362.3,1965.39 v1(2370,1957.69)
  Bottom Layer w6: v1(2070.02,1659.98) v1(2070.02,1711) ; v1(2143.09,1620) v1(2223.09,1540) ; v1(2308.69,1858.69) 2370,1920 v1(2370,1957.69)
NetJ2_9: J2.9 J6.1 U1.16 | length 1655.2
  Top Layer w6: v1(2130,1470) 2160,1470 2201.97,1511.97 ; v1(2130,1700) 2210,1780 v1(2370,1780) ; U1.16 2131.93,1279.81 2279.63,1427.51 2279.63,1432.49 2252,1460.12 2252,1461.94 2201.97,1511.97 ; J6.1 2352,1428 2352,1495.88 2319.88,1528 2260.75,1528 2248.59,1540.16 2248.59,1550.56 2233.65,1565.5 2212.53,1565.5 2206.41,1559.38 2205.56,1559.38 2190.62,1544.44 2190.62,1523.32 2201.97,1511.97 ; J2.9 2450,1894.65 2454.24,1890.41 2458.4,1890.41 2466.83,1881.97 v1(2471.97,1881.97)
  Bottom Layer w6: v1(2130,1470) v1(2130,1585.18) 2130,1590.32 2117.59,1602.73 2117.59,1645.94 2130,1658.35 v1(2130,1700) ; v1(2370,1780) 2405.05,1815.05 2405.05,1816.58 2419.99,1831.51 2421.51,1831.51 v1(2471.97,1881.97)
NetJ2_10: J2.10 J6.2 U1.17 | length 1547.9
  Top Layer w6: U1.17 2093.98,1130 2100.98,1137 2100.98,1161.48 2108.93,1169.44 2108.93,1288.93 2246.06,1426.06 v1(2246.06,1430) ; v1(2350,1533.94) 2350,1531.97 2400,1481.97 J6.2 2480,1560 v1(2490,1560) ; J2.10 2550.43,1980 2581.43,2011 v1(2630,2011) ; v1(2630,1960) 2552.53,1882.53 2552.53,1828.59 2540.51,1816.58 2540.51,1795.45 2552.53,1783.44 2552.53,1717.47 2595.98,1674.02 2602.05,1674.02 2645.5,1630.56 2645.5,1600.6 2640,1595.1 v1(2640,1560)
  Bottom Layer w6: v1(2246.06,1430) 2246.06,1493.94 2284.12,1532 2348.06,1532 v1(2350,1533.94) ; v1(2490,1560) v1(2640,1560) ; v1(2630,1960) v1(2630,2011)
NetJ3_3: J3.3 U1.32 | length 2333.9
  Top Layer w6: U1.32 2356.43,847 v1(2400,847) ; v1(2410,780) 2426.48,763.52 v1(2529.01,763.52) ; v1(2610,740) 2671,679 v1(2830,679) ; v1(2830,760) 2830,966.06 2932.37,1068.43 3225.32,1068.43 3356,1199.12 3356,1756.63 3210,1902.63 J3.3
  Bottom Layer w6: v1(2400,847) 2400,841.86 2410,831.86 v1(2410,780) ; v1(2529.01,763.52) 2552.53,740 v1(2610,740) ; v1(2830,679) v1(2830,760)
NetJ3_4: J3.4 U1.1 | length 2387.1
  Top Layer w6: v1(2240,1070.04) 2304.28,1134.32 v1(2304.98,1134.32) ; v1(2300,1010.04) 2300.1,1009.95 2300.1,988.54 2371.64,917 2401.5,917 U1.1 ; v1(2564.29,1174.29) 2773.59,1174.29 2792.38,1155.5 2890.56,1155.5 2951.5,1216.44 2951.5,1227.56 3012.44,1288.5 3227.38,1288.5 3295.88,1220 3340,1220 3340,1750 J3.4
  Bottom Layer w6: v1(2240,1070.04) v1(2300,1010.04) ; v1(2304.98,1134.32) 2304.98,1134.46 2358.52,1188 2440.56,1188 2458.82,1169.74 2458.82,1160.41 2477.09,1142.15 2502.05,1142.15 2534.19,1174.29 v1(2564.29,1174.29)
NetJ3_5: J3.5 U1.2 | length 1840.5
  Top Layer w6: U1.2 2415.5,934 2446.5,934 2450.5,930 2471.71,930 v1(2472,929.71) ; v1(2608.16,1038.4) 2608.16,1033.51 2611.68,1030 2623.94,1030 2661.94,1068 2849,1068 v1(2880,1099) ; v1(2880,1181) 2880,1250 v1(3010,1380) ; v1(3010,1450) 3085.25,1450 3324,1688.75 3324,1743.37 3215.37,1852 3138,1852 J3.5
  Bottom Layer w6: v1(2472,929.71) 2499.47,929.71 v1(2608.16,1038.4) ; v1(2880,1099) v1(2880,1181) ; v1(3010,1380) v1(3010,1450)
NetJ3_6: J3.6 U1.9 | length 1713.7
  Top Layer w6: U1.9 2395.88,1188.5 2464.5,1257.13 2464.5,1261.21 2479.44,1276.15 2495.76,1276.15 2545.12,1325.5 2608.51,1325.5 2641.51,1358.5 2647.18,1358.5 2671.5,1382.82 2671.5,1388.49 2694,1410.99 2694,1414.14 2720.36,1440.5 2723.51,1440.5 2910,1626.99 3239.62,1626.99 3308,1695.37 3308,1736.75 3208.75,1836 3054,1836 J3.6
NetJ3_7: J3.7 U1.10 | length 1120.2
  Top Layer w6: U1.10 2327.93,1195.5 2327.93,1225.37 2336.54,1233.98 2418.73,1233.98 2448.5,1263.75 2448.5,1267.84 2472.81,1292.15 2489.14,1292.15 2538.49,1341.5 2601.88,1341.5 2634.88,1374.5 2640.56,1374.5 2655.5,1389.44 2655.5,1395.12 2678,1417.62 2678,1420.77 2713.73,1456.5 2716.88,1456.5 2832,1571.62 2832,1793.31 2841.5,1802.81 2841.5,1948.5 J3.7
NetJ3_8: J3.8 U1.11 | length 1171.5
  Top Layer w6: U1.11 2295.93,1195.5 2295.93,1224.37 2305.54,1233.98 2313.92,1233.98 2329.92,1249.98 2365.98,1249.98 2400,1284 2439.76,1284 2510.5,1354.74 2510.5,1469.19 2580,1538.69 2580,1573.43 2589.5,1582.93 2589.5,1657.07 2537.07,1709.5 2533.77,1709.5 2505.5,1737.77 2505.5,1744.99 2524,1763.49 2524,1816.51 2504.5,1836.01 2504.5,1883.79 2546.43,1925.72 2556.53,1925.72 2610.81,1980 2613.94,1980 2619.44,1985.5 2640.56,1985.5 2646.06,1980 J3.8
NetJ4_1: J4.1 U1.23 | length 1467.4
  Top Layer w6: v1(2020,831) 2016.37,831 2002.87,844.5 1989.44,844.5 1974.5,859.44 1974.5,880.56 1989.44,895.5 1996.13,895.5 2005.13,904.5 2010.56,904.5 2025.5,919.44 2025.5,924.87 2034.63,934 2064.5,934 U1.23 ; v1(2040,780) 2066.06,780 2079.51,766.55 2079.51,754.43 2085.5,748.44 2085.5,739.44 2082.52,736.45 2082.52,731.48 2092.94,721.06 v1(2208.94,721.06) ; v1(2250,690) 2253.59,690 2291.59,652 2367.51,652 2384.5,635.01 2384.5,612.38 v1(2596.17,400.72) ; v1(2650,340) 2775,215 2775,204.79 2824.79,155 2835,155 J4.1
  Bottom Layer w6: v1(2020,831) 2040,811 v1(2040,780) ; v1(2208.94,721.06) 2225.75,704.25 2233.84,704.25 2248.09,690 v1(2250,690) ; v1(2596.17,400.72) 2596.17,397.28 2650,343.44 v1(2650,340)
NetJ4_2: J4.2 U1.24 | length 2240.4
  Top Layer w6: v1(1810,720) 1810,483.94 2000.94,293 2326.93,293 2333,286.93 v1(2333,282.58) ; v1(1923.94,720) 1949.44,745.5 1970.56,745.5 1985.5,730.56 1985.5,725.91 2000,711.41 v1(2000,710) ; v1(2000,870) 2009.02,870 2049.02,910 U1.24 ; v1(2430,280) 2572.26,280 2708.24,144.02 2708.24,139.05 2667,97.81 2667,62.19 2692.19,37 2815.26,37 2967,37 J4.2
  Bottom Layer w6: v1(1810,720) 1835.5,694.5 1871.37,694.5 1896.87,720 v1(1923.94,720) ; v1(2000,710) 2000,715.14 1994.5,720.64 1994.5,841.56 2000,847.06 v1(2000,870) ; v1(2333,282.58) 2335.58,280 v1(2430,280)
NetJ4_3: J4.3 U1.25 | length 3336.8
  Top Layer w6: U1.25 2131.93,911.93 2324.5,1104.5 2324.5,1117.92 2333.97,1127.39 2337.55,1127.39 2339.44,1125.5 2345.5,1125.5 v1@2351.76,1131.76 ; v1(2340.17,1133.59) v1@2346.88,1126.88 ; v1@2351.76,1133.52 2353.52,1133.52 2360,1140 ; v1(2384.43,1162.5) 2389.57,1162.5 2399.57,1172.5 2402.5,1172.5 2459.42,1229.42 2474.52,1229.42 2478.79,1225.15 2511.47,1225.15 2518.12,1218.5 2601.88,1218.5 2620,1236.62 2620,1290 2658.5,1328.5 2658.5,1347.19 2687.5,1376.19 2687.5,1381.86 2710,1404.36 2710,1407.51 2726.99,1424.5 3188.13,1424.5 3202.63,1410 v1(3220,1410) ; J4.3 3110,150 3114.5,154.5 3370.56,154.5 3376.06,160 3430,160 3440,170 3440,1353.94 3434.5,1359.44 3434.5,1380.56 3440,1386.06 v1(3440,1410)
  Bottom Layer w6: v1(2340.17,1133.59) 2345.31,1133.59 2356.33,1144.61 2363.81,1144.61 2381.7,1162.5 v1(2384.43,1162.5) ; v1(3220,1410) v1(3440,1410)
NetJ4_4: J4.4 U1.26 | length 3139
  Top Layer w6: U1.26 2162.93,912.93 v1(2350,1100) ; v1(2430,1162.5) 2445.42,1177.92 2445.42,1190.57 2463.99,1209.15 2504.84,1209.15 2511.49,1202.5 2608.51,1202.5 2640,1233.99 2640,1287.37 2674.5,1321.87 2674.5,1340.56 2726,1392.06 2726,1400.88 2733.62,1408.5 3181.5,1408.5 v1(3220,1370) ; J4.4 3249.19,80 3307.69,138.5 3448.5,138.5 3460,150 v1(3460,1370)
  Bottom Layer w6: v1(2350,1100) 2381.25,1131.25 2398.75,1131.25 v1(2430,1162.5) ; v1(3220,1370) v1(3460,1370)
NetJ5_2: J5.2 U2.6 | length 1956.3
  Top Layer w6: J5.2 263.86,1886.61 307.09,1929.83 336.25,1929.83 422.92,2016.5 1184.01,2016.5 1443,1757.51 1443,1515.66 1480,1478.66 v1(1480,1340) ; U2.6 1455,1234.31 1480,1259.31 v1(1480,1289)
  Bottom Layer w6: v1(1480,1289) v1(1480,1340)
NetJ5_3: J5.3 U2.5 | length 1827.4
  Top Layer w6: J5.3 311.98,1819.94 343.88,1819.94 394.55,1870.61 394.55,1897.19 418.86,1921.5 445.44,1921.5 508.44,1984.5 1170.75,1984.5 1230,1925.25 1230,1395.34 1387.59,1237.75 1396.69,1237.75 1405,1229.44 U2.5
NetLED1_2: LED1.2 R2.2 | length 121.4
  Top Layer w6: R2.2 219,600 LED1.2
NetLED2_1: LED2.1 R1.1 | length 121
  Top Layer w6: LED2.1 R1.1
NetLED3_2: LED3.2 R3.2 | length 150.9
  Top Layer w6: LED3.2 3182,480 3201,461 R3.2
NetLED4_2: LED4.2 R5.2 | length 303
  Top Layer w6: R5.2 2099,453.5 2118,472.5 2138.5,472.5 2144.5,478.5 2157.19,478.5 2181.5,502.81 2181.5,515.5 2267,601 LED4.2
NetLED5_2: LED5.2 R7.2 | length 191.8
  Top Layer w6: LED5.2 681,1906.5 700,1887.5 705,1887.5 799,1793.5 R7.2
NetLED6_2: LED6.2 R8.2 | length 160.2
  Top Layer w6: R8.2 521,1622 566.5,1667.5 580,1667.5 599,1686.5 LED6.2
reset: C8.2 C9.2 J1.3 J6.3 LED4.1 R6.2 SW3.3 SW3.4 TP5.1 U1.29 | length 4194.6
  Top Layer w6: C8.2 1478,1606.5 1545.5,1539 C9.2 1700.05,1539.05 1762.99,1539.05 1769.44,1545.5 1790.56,1545.5 1797.01,1539.05 SW3.4 SW3.4@1875.98,1539.05 ; v1(2140,520) 2160,540 TP5.1 2224.5,684.5 2224.5,700.56 2239.44,715.5 2255.5,715.5 2259,719 LED4.1@2306.5,719 ; v1(2144.03,447.61) 2276.71,447.61 2334.52,389.8 2334.52,361.16 2388.5,307.18 2388.5,262.81 2412.81,238.5 2435.44,238.5 2453,220.94 2453,186.37 2450.32,183.68 2450.32,162.56 2453,159.88 2453,62.19 2427.81,37 2392.19,37 2360,69.19 2360,90.81 2327.81,123 2292.19,123 2249.19,80 J1.3 ; J6.3 2400,1624.47 2403.51,1627.98 2443.08,1627.98 2467.06,1604 2479.94,1604 2489.44,1594.5 2510.56,1594.5 2525.5,1609.44 2525.5,1630.56 2510.56,1645.5 2497.13,1645.5 2482.65,1659.98 2243.92,1659.98 2216.94,1633 2192.81,1633 2168.5,1608.69 2168.5,1584.56 2156.45,1572.51 2156.45,1559.68 2135.83,1539.05 2115.2,1559.68 2079.01,1559.68 2077.19,1561.5 2036.56,1561.5 2020.56,1545.5 1998.44,1545.5 1991.99,1539.05 SW3.4@1875.98,1539.05 ; R6.2 LED4.1 LED4.1@2306.5,719 ; SW3.4@1875.98,1539.05 1896.61,1518.43 1896.61,1465.95 1954,1408.56 1954,1062.06 1965.5,1050.56 1965.5,1029.44 1954,1017.94 1954,990.06 1944.5,980.56 1944.5,959.44 1954,949.94 1954,809.51 1958.01,805.5 2094.43,805.5 2109.92,790.02 2184.94,790.02 2200.43,805.5 2240.8,805.5 2250.93,815.63 2250.93,844.5 U1.29 2257.93,808.4 2275.5,790.83 2275.5,777.22 2287.5,765.22 2287.5,738 LED4.1@2306.5,719
  Bottom Layer w6: v1(2140,520) 2142.02,517.98 2142.02,449.62 v1(2144.03,447.61)
rg5v: LED3.1 SW1.2 SW2.2 TP3.1 | length 1311.5
  Top Layer w20: SW2.2 2431.5,328.5 2450.09,328.5 2451.07,327.52 2587.52,327.52 2601.5,341.5 2601.5,360.09 2629.91,388.5 2648.5,388.5 SW1.2 2723.34,460 2814,369.34 2814,220.95 2840.95,194 2879.05,194 2941,255.95 2941,627.47 2980,666.47 TP3.1
rg5vsw: C6.2 J1.8 J6.4 L1.1 R6.1 SW1.1 U1.4 U1.6 | length 2434.3
  Top Layer w20: v1(2260,1320) 2260,1328.08 2300,1368.08 J6.4 ; v1(2462.01,1062.01) 2460.66,1062.01 2455.67,1067 U1.6 2368.74,1067 2356.02,1054.28 2356.02,1017.72 2369.74,1004 U1.4 2455.96,1004 2462.54,997.43 2485.25,997.43 2504.5,978.17 2504.5,909.54 2547.5,866.54 2547.5,856.54 2566.54,837.5 2576.54,837.5 2583,831.04 2583,758.96 2577.5,753.46 2577.5,726.54 2583,721.04 2583,693.59 2525.5,636.09 2525.5,613 R6.1@2513.5,601 ; v1(2487.65,1167.65) 2491.18,1167.65 2514.89,1143.94 2522.02,1143.94 2552.5,1113.46 2552.5,1086.5 C6.2 ; v1(2490,1250.65) 2490.96,1251.61 2553.11,1251.61 L1.1 2570,1268.5 v1(2570,1300) ; R6.1 R6.1@2513.5,601 ; v1(2520,1100) 2520.96,1099.04 2526.46,1099.04 C6.2@2546.5,1079 ; J1.8 2779.04,149.04 2779.04,162.58 v1(2780,163.54) ; v1(2862.5,246.04) 2862.5,417.5 SW1.1 2714.47,560 2673.47,601 R6.1@2513.5,601
  Bottom Layer w20: v1(2260,1320) 2548.65,1320 2568.65,1300 v1(2570,1300) ; v1(2462.01,1062.01) 2462.97,1062.97 2482.97,1062.97 v1(2520,1100) ; v1(2487.65,1167.65) 2487.65,1246.95 2490,1249.3 v1(2490,1250.65) ; v1(2780,163.54) v1(2862.5,246.04)
rxled: J3.1 R8.1 TP6.1 U1.30 | length 6019
  Top Layer w6: TP6.1 592.5,1520 ; v1@512.5,1440 592.5,1520 ; v1(520,1300) 1060,760 1583.94,760 1589.44,754.5 1610.56,754.5 1616.06,760 v1(1860,760) ; R8.1@639,1566.5 592.5,1520 ; v1(1911,760) 1941.31,760 1942.81,761.5 1977.19,761.5 1998.69,740 2030.27,740 2034.9,744.63 2051.13,744.63 v1(2054.77,748.27) ; v1(2105.01,764.99) 2182.54,764.99 2192.03,774.47 2244.47,774.47 v1(2250,780) ; v1(2301,790) 2301,795.14 2288.93,807.21 U1.30 2295.93,844.5 2295.93,815.63 2315.5,796.06 2323.87,796.06 2329.92,790.02 2373.94,790.02 2379.98,796.06 2390,796.06 2399.44,805.5 2420.56,805.5 2430,796.06 2540.43,796.06 2560,776.49 2560,768.49 2554.5,762.99 2554.5,717.01 2560,711.51 2560,703.12 2516.88,660 2483.12,660 2451.5,628.38 2451.5,573.62 2510.01,515.11 2728.37,515.11 2837,406.48 2837,230.47 2850.47,217 2869.53,217 2891.49,238.96 2891.49,668 2913.99,690.51 2922.63,690.51 3017.62,785.5 3080.38,785.5 3110.38,815.5 3133.01,815.5 3150,832.49 3150,855.12 3244.88,950 3247.51,950 3264.5,966.99 3264.5,969.62 3394.5,1099.62 3394.5,1730.56 3410,1746.06 J3.1
  Top Layer w15: v1(510,1440) v1@512.5,1440 ; R8.1@639,1566.5 R8.1
  Bottom Layer w6: v1(510,1440) 572.98,1377.02 572.98,1324.59 550.3,1301.91 v1@521.91,1301.91 ; v1(1860,760) v1(1911,760) ; v1(2054.77,748.27) 2058.27,748.27 2080.51,770.51 2085.48,770.51 2087.37,768.63 2101.38,768.63 v1(2105.01,764.99) ; v1(2250,780) 2285.86,780 2295.86,790 v1(2301,790)
  Bottom Layer w15: v1(520,1300) v1@521.91,1301.91
txled: J3.2 R7.1 TP7.1 U1.31 | length 5829.7
  Top Layer w6: R7.1 681,1659 v1(700,1640) ; v1(765,1630) 770.14,1630 780.14,1620 TP7.1 970.84,1670.84 996.9,1670.84 1093.45,1767.39 1093.45,1823.45 1180.8,1910.8 1180.8,1915.77 v1(1178.28,1918.28) ; v1(1253.29,1983.29) 1560.59,1675.98 1597.96,1675.98 1599.44,1674.5 1620.56,1674.5 1622.04,1675.98 1629.96,1675.98 1639.47,1685.5 1829.94,1685.5 1839.44,1695 1860.56,1695 1870.06,1685.5 2080.56,1685.5 2090.08,1675.98 2117.96,1675.98 2119.44,1674.5 2140.56,1674.5 2142.04,1675.98 2221.2,1675.98 2230.7,1685.48 v1(2426.97,1685.48) ; U1.31 2327.93,844.5 2327.93,814.63 2336.54,806.02 2367.31,806.02 2374.31,813.01 2384.32,813.01 2392.81,821.5 2427.19,821.5 2435.68,813.01 2493.01,813.01 2504.04,824.04 v1(2504.04,864.04) ; v1(2578.03,1728.03) 2654,1804 2779.94,1804 2789.44,1794.5 2810.56,1794.5 2825.5,1809.44 2825.5,1830.56 2810.56,1845.5 2797.13,1845.5 2753,1889.63 2753,1983.81 2792.19,2023 3267,2023 J3.2 3310,1825.25 3374,1761.25 3374,1101.74 3248.5,976.24 3248.5,973.62 3240.88,966 3238.26,966 3134,861.74 3134,839.12 3126.38,831.5 2972.31,831.5 2885.5,744.69 2885.5,737.01 2852.99,704.5 2807.01,704.5 2805,706.51 2683.64,706.51 2606,784.15 2606,840.57 2580,866.57 v1(2580,870)
  Bottom Layer w6: v1(700,1640) 749.86,1640 759.86,1630 v1(765,1630) ; v1(1178.28,1918.28) 1239.65,1979.65 1249.65,1979.65 v1(1253.29,1983.29) ; v1(2426.97,1685.48) 2430.61,1681.85 2447.62,1681.85 2451.47,1677.99 2527.99,1677.99 v1(2578.03,1728.03) ; v1(2504.04,864.04) 2507.02,867.02 2577.02,867.02 v1(2580,870)
usb5v: J5.1 SW2.1 | length 3595.8
  Top Layer w6: J5.1 429.55,2000.5 1177.38,2000.5 1280,1897.88 1280,1395.34 1355.34,1320 1463.94,1320 1469.44,1314.5 1490.56,1314.5 1496.06,1320 1504.66,1320 1716,1108.66 1716,1022.06 1716,997.94 1729.44,984.5 1738.62,984.5 1771.62,951.5 1785.38,951.5 1884,852.88 1884,772.06 1885.5,770.56 1885.5,749.44 1884,747.94 1884,732.06 1898.44,717.62 1898.44,709.44 1908,699.88 1908,604.12 2014.42,497.7 2126.24,497.7 2129.44,494.5 2150.56,494.5 2165.5,509.44 2165.5,522.38 2279.12,636 2360.88,636 2368.5,628.38 2368.5,566.14 2362.3,559.94 2362.3,497.7 SW2.1
pads on no net: D1.3 D1.4 J1.1 J1.2 J5.4 U1.19 U1.22 U2.4 U2.9 U2.10 U2.11 U2.12 U2.14 U2.15

## Polygon pours and split planes (outlines as drawn)
GND on Bottom Layer "GND_L02_P000" (solid, pour order 0): 0,2050 3500,2050 3500,0 0,0

## Keep-outs
Keep-Out Layer:
  lines w20: 0,0 0,2050 3500,2050 3500,0 0,0

## Silkscreen, mask and mechanical layers (free items; w line width, h text height)
Top Overlay:
  text "22uf" at 1330,1780 h40
  text "10uf" at 1640,1680 h40
  text "10uf" at 2740,1500 h40
  text "22pf" at 3230,1313.33 h40
  text "22uf" at 900,1220 h40 r90
  text "22pf" at 1670,1153.33 h40
  text "1mΩ" at 3320,990 h40 r90
  text "10uf" at 2520,930 h40 r90
  text "22pf" at 1050,923.33 h40
  text "22pf" at 3150,863.33 h40
  text "1MΩ" at 1270,850 h40
  text "10uf" at 1860,770 h40
  text "22uf" at 70,700 h40
  text "1uf" at 380,670 h40
  text "Gavin Unrue" at 870,560 h40
  text "ECEN5730_brd3a_10-18-2024" at 870,456.66 h40
  text "ECEN 5730 Arduino brd" at 870,350 h40

## Text inside footprints (layer, text, board x,y; h text height)
J2: Top Overlay "D8" at 2539,1844.41 h30 r45; Top Overlay "D9~" at 2416,1819.67 h30 r45; Top Overlay "D10~" at 2307,1802 h30 r45; Top Overlay "D11~" at 2206,1805.53 h30 r45; Top Overlay "D12" at 2113,1826.74 h30 r45; Top Overlay "D13" at 2022,1826.74 h30 r45; Top Overlay "GND" at 1916,1823.21 h30 r45; Top Overlay "AREF" at 1789,1802 h30 r45; Top Overlay "SDA" at 1713,1823.21 h30 r45; Top Overlay "SCL" at 1621,1823.21 h30 r45